# Altium PCB PCB1.PcbDoc
Units mm, origin at the board's own origin, x right, y up, seen from the top; angles counter-clockwise.
Board outline 44.5 x 44.5 mm, 2 copper layers (Top Layer, Bottom Layer); 27 components, 28 nets, 123 pads, 16 vias.
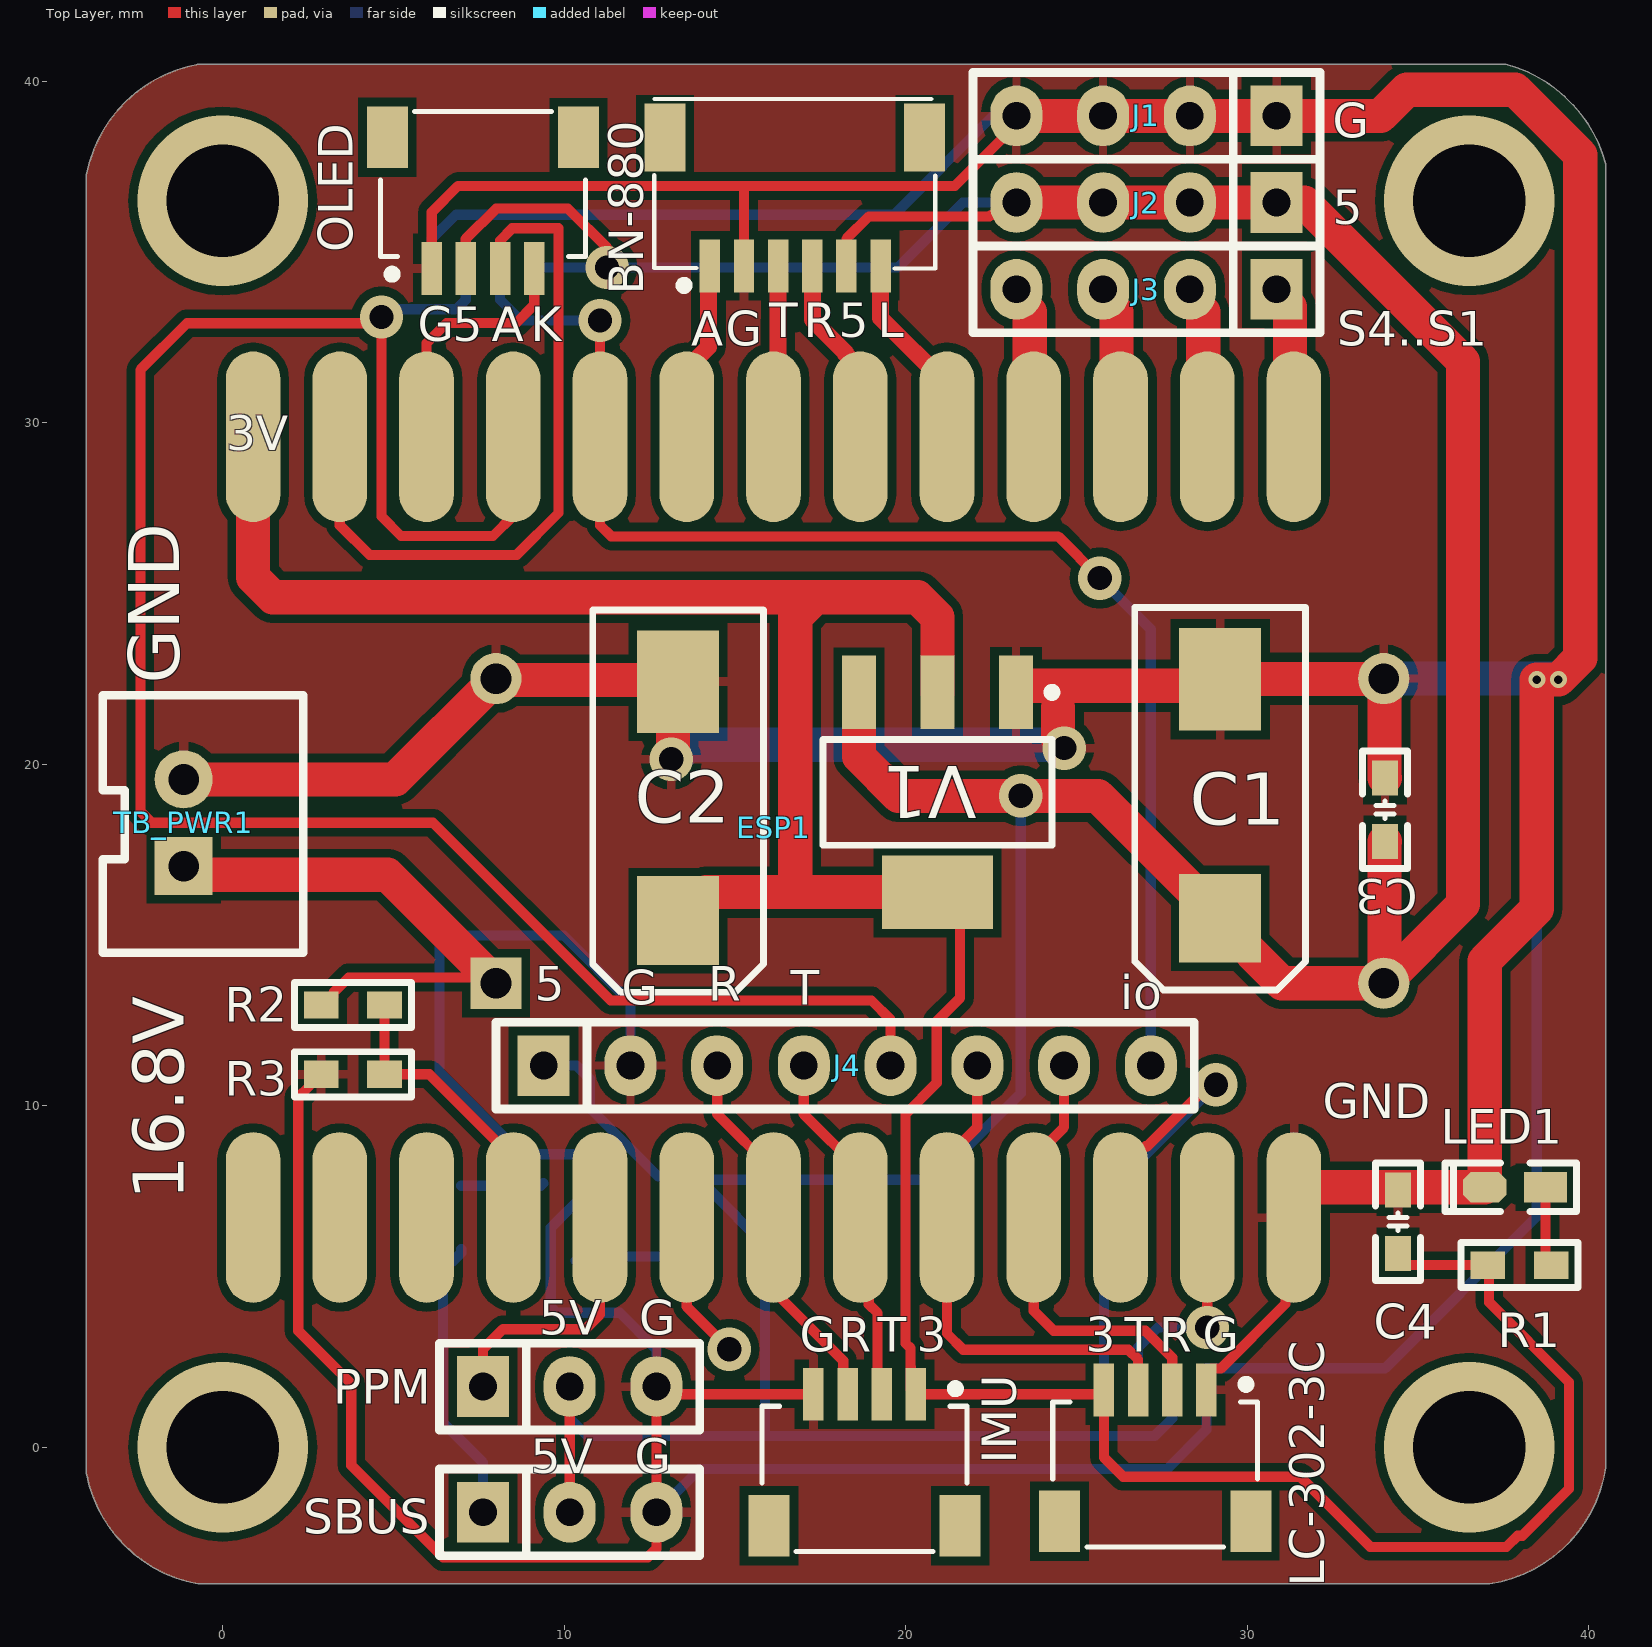
[diagram p0: Top Layer view]
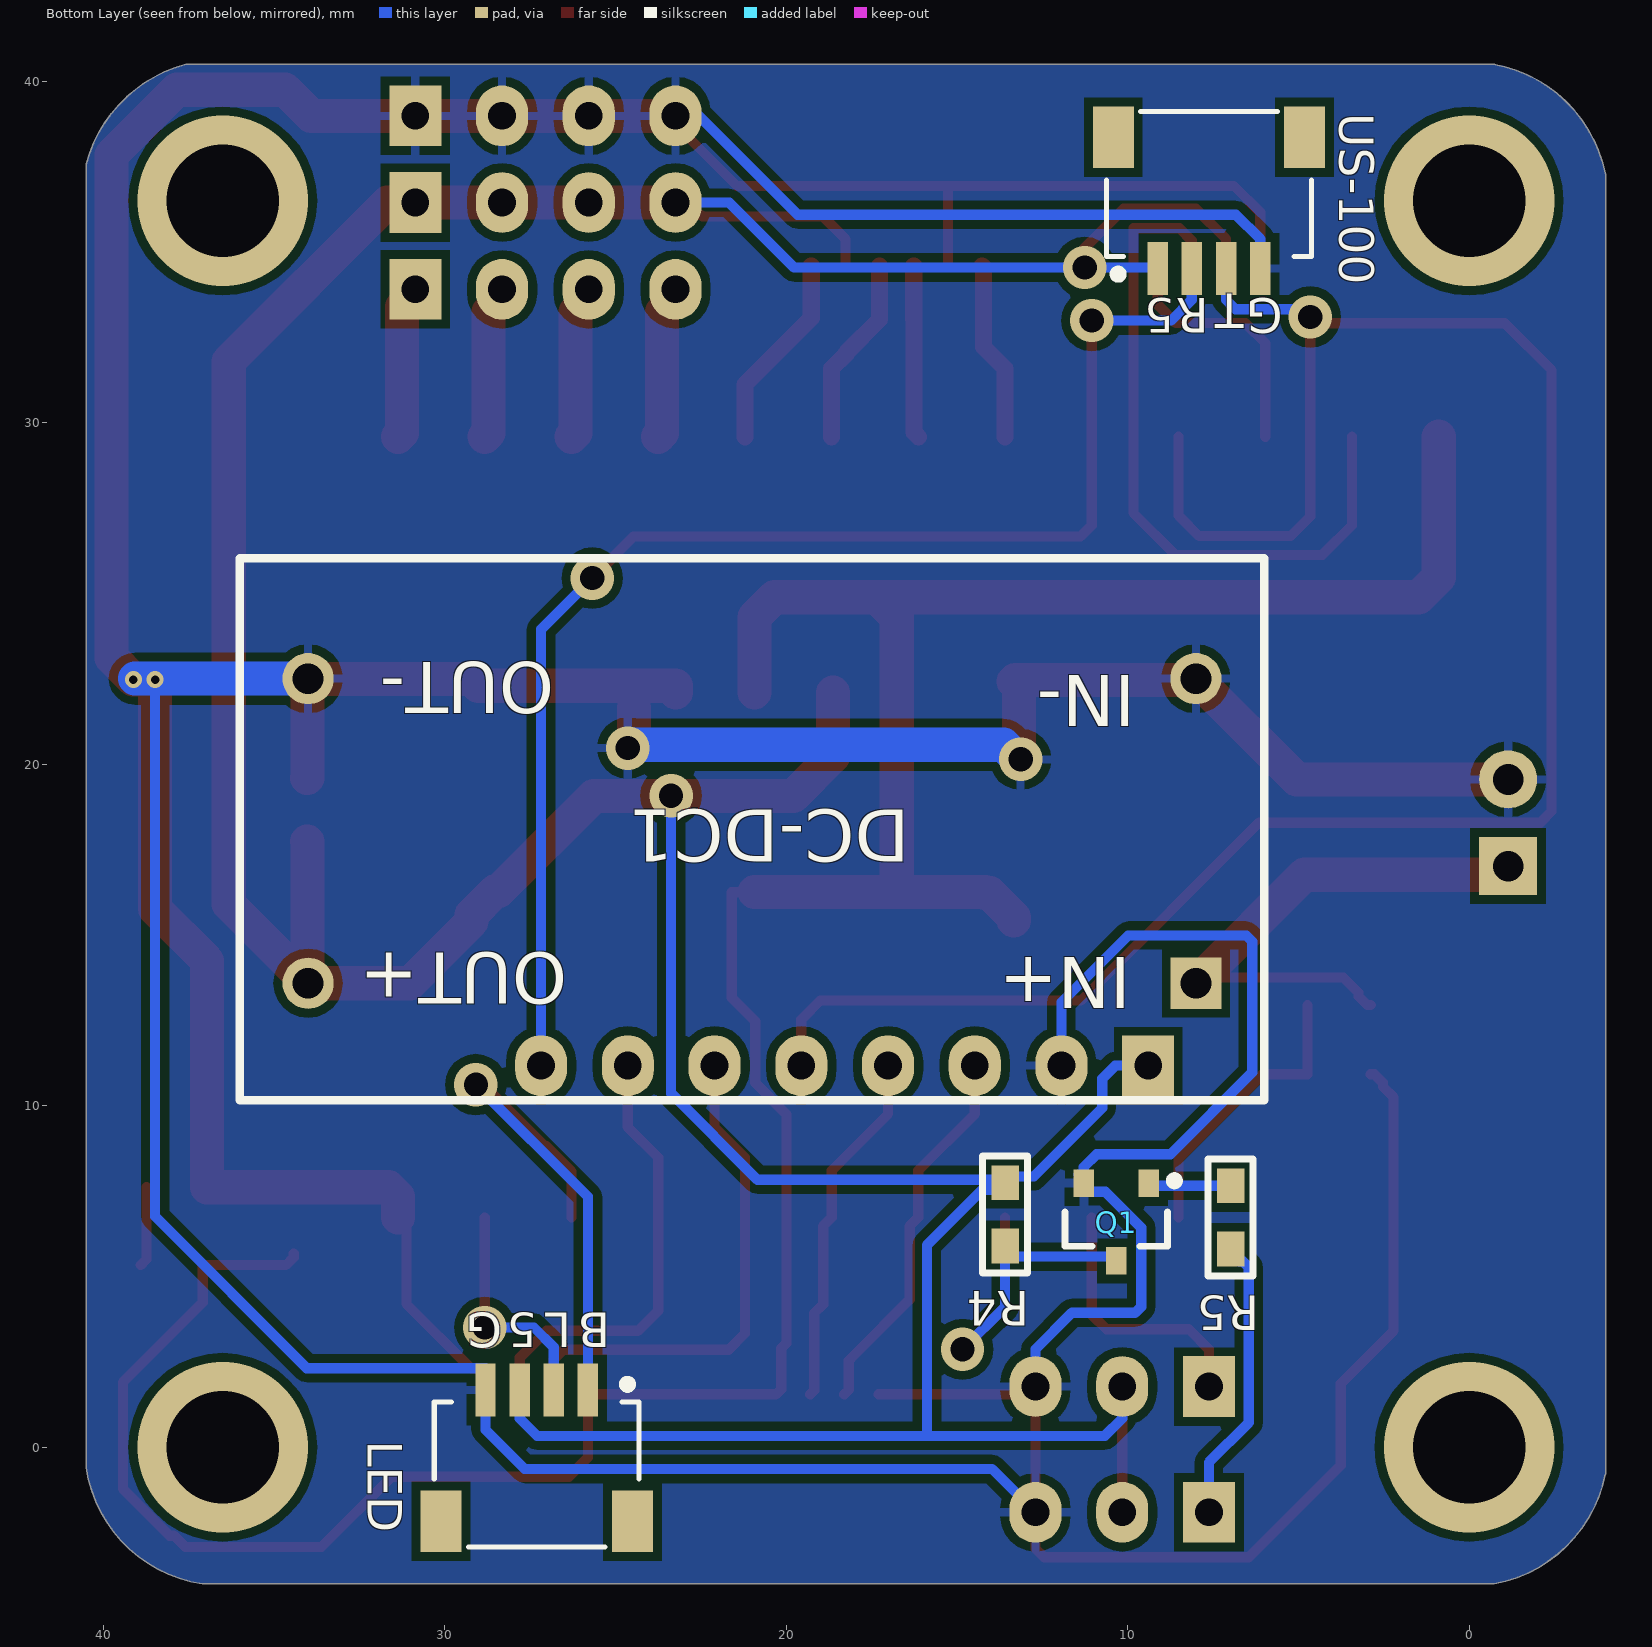
[diagram p1: Bottom Layer view, seen from below]

## Layer stack, top to bottom
Top Solder: solder mask 0.0102, Solder Resist, Dk 3.5
Top Layer: signal copper 0.0356
Dielectric 1: dielectric 0.32, FR-4, Dk 4.8
Bottom Layer: signal copper 0.0356
Bottom Solder: solder mask 0.0102, Solder Resist, Dk 3.5

## Board outline
-4,-0.797 -4,37.275 -3.981,37.321 cw(c0,36.5) -0.7,40.504 -0.749,40.5 37.582,40.5 cw(c36.5,36.5) 40.5,37.582 40.5,-0.602 cw(c36.5,0) 37.102,-4 -0.73,-4 cw(c0,0)

## Design rules (kind name [scope] priority, off if disabled: settings)
Clearance [All] p1: gap=0.254 ignorepadtopadclearanceinfootprint=FALSE except(0: Arc-Hole Track-Hole SMDPad-Hole THPad-Hole Via-Hole Fill-Hole Poly-Hole Region-Hole Text-Hole)
PolygonConnect [All] p1: connectstyle=Relief reliefconductorwidth=0.254 reliefentries=4 polygonreliefangle="90 Angle" airgapwidth=0.254
RoutingVias [All] p1: holewidth=0.711 width=1.27 viastyle="Through Hole" minholewidth=0.711 minwidth=1.27 maxholewidth=0.711 maxwidth=1.27
SolderMaskExpansion [All] p1: expansion=0.102 istentingtop=FALSE
Width [All] p1: maxlimit=2 minlimit=0.254 preferedwidth=0.3
30 further rules are at their usual default settings.

## Components (designator, comment, footprint, x,y, rotation, side; value= is the part's Value field where it differs from the comment)
BN-880 "Pin HDR1X6" "SH1.0 S-W-6P" 16.754,36.654 r180 top
C1 "100uf" C7343-D 29.21,18.994 r270 top
C2 "100uf" C7343-D 13.335,18.923 r270 top
C3 "104" "C 0603_M" 34.036,18.669 r270 top
C4 "104" "C 0603_M" 34.417,6.604 r270 top
DC-DC1 "DC-DC" DC-DC 8.001,13.589 r0 bottom
ESP1 "ESP32" esp32 0.889,6.731 r0 top
IMU "Female HDR1X4" "SH1.0 S-W-4P" 18.796,-3.048 r0 top
J1 "Pin HDR1X4" "Pin HDR1X4/2.54mm-S" 30.861,38.989 r270 top
J2 "Pin HDR1X4" "Pin HDR1X4/2.54mm-S" 30.861,36.449 r270 top
J3 "Pin HDR1X4" "Pin HDR1X4/2.54mm-S" 30.861,33.909 r270 top
J4 "Female HDR1X8" Fe-HDR1X8/2.54-S 9.398,11.176 r90 top
LC-302-3C "Female HDR1X4" "SH1.0 S-W-4P" 27.305,-2.921 r0 top
LED "Female HDR1X4" "SH1.0 S-W-4P" 27.305,-2.921 r180 bottom
LED1 "红色" "LED 0603R" 37.846,7.62 r180 top
OLED "Female HDR1X4" "SH1.0 S-W-4P" 7.62,39.116 r180 top
PPM "HDR-1X3" "Pin HDR1X3/2.54mm-S" 7.62,1.778 r90 top
Q1 "SS8050" SOT23-3L 10.335,6.586 r0 bottom
R1 "1k" "R 0603_M" 37.973,5.334 r180 top
R2 "4.7K" "R 0603_M" 3.81,12.954 r180 top
R3 "1K" "R 0603_M" 3.81,10.922 r0 top
R4 "10K" "R 0603_M" 13.589,6.82 r270 bottom
R5 "1k" "R 0603_M" 6.985,6.731 r270 bottom
SBUS "HDR-1X3" "Pin HDR1X3/2.54mm-S" 7.62,-1.905 r90 top
TB_PWR1 "TB002-500-02BE" XH2.54-LI-2P -1.143,18.288 r90 top
US-100 "Female HDR1X4" "SH1.0 S-W-4P" 7.62,39.116 r0 bottom
V1 "AMS1117 3.3" SOT223 23.232,22.106 r270 top

## Footprints (in the part's own frame and the unit in brackets; to place one, negate y for a bottom-side part, rotate by r counter-clockwise, add the part's x,y. Pads: shape width x height; smd on the part's side, far side on the other; paste and mask are expansions set on the pad)
C7343-D [mm]
  rect 2.6x2.4 smd: 1(3.5,0)
  rect 3x2.4 smd: 2(-3.5,0)
  silkscreen extent -5.6,-2.5 5.6,2.5, body extent -3.8,-2.3 3.8,2.3, height 3.1
"C 0603_M" [mil] "无极性贴片电容"
  rect 40x30 smd: 1(-36.5,0) 2(36.5,0)
  silkscreen extent -68,-26 67,26, body extent -31,-16 31,16, height 32
DC-DC [mm]
  rect 1.5x1.5 hole 0.9: 1(0,0)
  round 1.5 hole 0.9: 2(0,-8.92) 3(26,-8.92) 4(26,0)
  silkscreen extent -2,-12.45 28,3.43
esp32 [mm]
  oval 1.6x5 smd: 1(0,0) 2(2.54,0) 3(5.08,0) 4(7.62,0) 5(10.16,0) 6(12.7,0) 7(15.24,0) 8(17.78,0) 9(20.32,0) 10(22.86,0) 11(25.4,0) 12(27.94,0) 13(30.48,0) 14(0,22.86) 15(2.54,22.86) 16(5.08,22.86) 17(7.62,22.86) 18(10.16,22.86) 19(12.7,22.86) 20(15.24,22.86) 21(17.78,22.86) 22(20.32,22.86) 23(22.86,22.86) 24(25.4,22.86) 25(27.94,22.86) 26(30.48,22.86)
  body extent -1.55,-2.05 32,24.88, height 7.55
Fe-HDR1X8/2.54-S [mil]
  rect 70x60 hole 32: 1(0,0)
  oval 70x60 hole 32: 2(0,-100) 3(0,-200) 4(0,-300) 5(0,-400) 6(0,-500) 7(0,-600) 8(0,-700)
  silkscreen extent -50,-750 50,55, body extent -49,-755 49,55, height 126
"LED 0603R" [mil] "红色0603LED"
  rect 50x35 smd: 1(-35,0.26)
  oct 50x35 smd: 2(35,0.26)
  silkscreen extent -71,-28 81,28, body extent -31,-16 31,16, height 24
"Pin HDR1X3/2.54mm-S" [mil]
  rect 70x60 hole 32: 1(0,0)
  oval 70x60 hole 32: 2(0,-100) 3(0,-200)
  silkscreen extent -50,-250 50,50, body extent -50,-250 50,50, height 336
"Pin HDR1X4/2.54mm-S" [mil]
  rect 70x60 hole 32: 1(0,0)
  oval 70x60 hole 32: 2(0,-100) 3(0,-200) 4(0,-300)
  silkscreen extent -50,-350 50,50, body extent -50,-350 50,50, height 336
"R 0603_M" [mil] "1/10W贴片电阻"
  rect 40x31.5 smd: 1(-36.5,0) 2(36.5,0)
  silkscreen extent -68,-26 67,26, body extent -31,-16 31,16, height 16
"SH1.0 S-W-4P" [mm]
  rect 1.2x1.8 smd: 0(-2.8,0.75) 0(2.8,0.75)
  rect 0.6x1.55 smd: 1(1.5,4.6) 2(0.5,4.6) 3(-0.5,4.6) 4(-1.5,4.6)
  silkscreen extent -3,0 3,4.89, body extent -3,0 3,4.95, height 2.92
"SH1.0 S-W-6P" [mm]
  rect 1.2x2 smd: 0(-3.8,-1.7) 0(3.8,-1.7)
  rect 0.6x1.55 smd: 1(2.489,2.057) 2(1.489,2.057) 3(0.489,2.057) 4(-0.511,2.057) 5(-1.511,2.057) 6(-2.511,2.057)
  silkscreen extent -4.11,-2.83 4.11,2.76, body extent -3.99,-2.48 4.01,2.47, height 2.9
SOT23-3L [mm]
  rect 0.6x0.8 smd: 1(-0.95,-1.143) 2(0.95,-1.143) 3(0,1.125)
  silkscreen extent -1.83,-1.34 1.5,0.7, body extent -1.5,-1.2 1.5,1.2, height 1.05
SOT223 [mm]
  rect 2.15x1 smd: 1(0,0) 2(0,-2.3) 3(0,-4.6)
  rect 2.15x3.25 smd: 2(5.85,-2.3)
  silkscreen extent -0.12,-5.65 4.47,1.18, body extent -0.56,-5.54 6.4,0.96, height 1.7
XH2.54-LI-2P [mm] "接插件，2P"
  rect 1.7x1.7 hole 0.9: 1(-1.27,0)
  round 1.7 hole 0.9: 2(1.27,0)
  silkscreen extent -3.81,-3.51 3.74,2.37, body extent -3.77,-3.3 3.77,2.4, height 7.05

## Part data
C1 C2: library part C-CD, "贴片钽电容", BOM名称=贴片钽电容, 版权归属=源创客, 学习资源=www.ooocke.com
C3 C4: library part C, "无极性贴片电容", BOM名称=无极性贴片电容, 版权归属=源创客, 材质=X7R, 学习资源=www.ooocke.com
LED1: library part LED-F234, "方形LED", BOM名称=方形LED, 版权归属=源创客, 学习资源=www.ooocke.com
PPM SBUS: library part "Header 3", "3P接插件", BOM名称=3P接插件, 版权归属=源创客, 学习资源=www.ooocke.com
Q1: library part 8050-SMD, "高频放大-NPN型", BOM名称=高频放大-NPN型, 版权归属=源创客, 属性="40V 1.5A 1W 100MHZ", 学习资源=www.ooocke.com
R1 R2 R3 R4 R5: library part R, "贴片电阻", BOM名称=贴片电阻, 版权归属=源创客, 学习资源=www.ooocke.com
TB_PWR1: Supplier Part Number 1=490-TB002-500-02BE, Supplier 1=Mouser
V1: library part LM317, "可调线性稳压芯片", BOM名称=可调线性稳压芯片, 版权归属=源创客, 学习资源=www.ooocke.com

## Via types
v1: diameter 1.27, hole 0.711, Top Layer to Bottom Layer, 10 vias
v2: diameter 5, hole 3.3, Top Layer to Bottom Layer, 4 vias
v3: diameter 0.5/0.5 (per signal layer), hole 0.25, Top Layer to Bottom Layer, 2 vias

## Nets (pads, with @x,y where several pads share a name; then routed paths per layer and width w, separated by ;. In a path a pad name is that pad's centre, name@x,y a point inside that pad or via, vN(x,y) a via of type N, cw(c..) or ccw(c..) an arc to the next point about the centre after c; other vN are vias at no path point)
+3.3: C2.1 C4.2 ESP1.14 IMU.1 LC-302-3C.4 R1.2 V1.2 | length 93.2
  Top Layer w0.3: V1.2@20.932,16.256 21.593,16.256 21.593,13.16 20.907,12.474 20.907,10.671 19.993,9.756 19.993,3.049 20.144,2.898 20.144,2.353 20.146,2.351 20.146,1.702 IMU.1 25.678,1.552 LC-302-3C.4 25.805,-0.298 26.368,-0.861 31.55,-0.861 33.607,-2.918 37.595,-2.918 37.925,-2.588 38.052,-2.588 39.424,-1.216 39.424,1.908 37.084,4.247 37.084,5.296 R1.2 34.648,5.334 34.417,5.565 C4.2
  Top Layer w1: ESP1.14 0.889,25.478 1.475,24.892 17.35,24.892 ; C2.1 13.335,15.523 14.035,16.223 14.135,16.223 14.168,16.256 16.764,16.256 ; V1.2@20.932,16.256 16.764,16.256 ; V1.2@20.932,22.106 20.932,24.306 20.346,24.892 17.35,24.892 ; 16.764,16.256 16.764,24.306 17.35,24.892
+5: BN-880.5 C1.1 C3.2 DC-DC1.4 J2.1 J2.2 J2.3 J2.4 J4.1 LED.3 OLED.2 PPM.2 R4.1 SBUS.2 US-100.1 V1.3 | length 151.3
  Top Layer w0.3: OLED.2 7.12,35.385 8.009,36.274 10.112,36.274 11.255,35.131 v1(11.255,34.547) ; SBUS.2 PPM.2 ; BN-880.5 18.265,35.385 18.925,36.045 22.453,36.045 22.496,36.088 22.88,36.088 J2.4 ; V1.3 18.632,20.23 18.632,20.145 19.699,19.078 v1(23.371,19.078)
  Top Layer w1: V1.3 18.632,20.23 19.794,19.068 25.636,19.068 28.41,16.294 28.51,16.294 29.21,15.594 C1.1 29.21,15.394 31.015,13.589 DC-DC1.4 DC-DC1.4@34.019,13.607 ; J2.4 J2.3 J2.2 J2.1 31.672,36.449 36.322,31.799 36.322,15.91 DC-DC1.4@34.019,13.607 ; C3.2 34.027,17.742 34.019,17.734 DC-DC1.4@34.019,13.607
  Bottom Layer w0.3: US-100.1 9.12,34.547 v1(11.255,34.547) 19.767,34.547 21.669,36.449 J2.4 ; J4.1 10.366,11.176 10.747,10.795 10.747,9.934 12.754,7.928 13.589,7.928 R4.1 ; PPM.2 10.16,0.841 10.668,0.333 15.827,0.333 ; v1(23.371,19.078) 23.371,10.366 20.842,7.837 13.499,7.837 R4.1 ; LED.3 27.805,0.841 27.297,0.333 15.827,0.333 ; R4.1 13.8,7.536 14.263,7.536 15.878,5.921 15.878,0.384 15.827,0.333
+16.8: DC-DC1.1 R2.2 TB_PWR1.1 | length 15.9
  Top Layer w0.3: R2.2 2.991,12.954 3.241,13.204 3.241,13.312 3.687,13.758 7.832,13.758 DC-DC1.1
  Top Layer w1: TB_PWR1.1 -0.889,16.764 4.826,16.764 DC-DC1.1@7.832,13.758
ADC1: ESP1.4 R2.1 R3.2 | length 8.6
  Top Layer w0.3: R2.1 4.737,11.915 R3.2 6.048,10.922 8.509,8.461 ESP1.4
ADO: ESP1.10 J4.7 LC-302-3C.2 | length 13.1
  Top Layer w0.3: J4.7 24.638,9.375 23.749,8.486 ESP1.10 23.749,3.999 24.336,3.412 27.012,3.412 27.805,2.619 LC-302-3C.2
BUZZER: ESP1.11 LED.1 | length 15.5
  Top Layer w0.3: ESP1.11 26.289,8.079 27.027,8.817 27.071,8.817 28.874,10.62 v1(29.086,10.62)
  Bottom Layer w0.3: LED.1 25.805,7.339 v1(29.086,10.62)
GND: BN-880.2 C1.2 C2.2 C3.1 C4.1 DC-DC1.2 DC-DC1.3 ESP1.13 IMU.4 J1.1 J1.2 J1.3 J1.4 J4.2 LC-302-3C.1 LED1.2 LED.4 OLED.1 PPM.3 Q1.2 R3.1 SBUS.3 TB_PWR1.2 US-100.4 V1.1 | length 263.2
  Top Layer w0.3: R3.1 2.775,10.922 2.525,10.672 2.525,10.564 2.213,10.252 2.213,3.406 3.762,1.857 3.762,-0.531 6.454,-3.223 12.446,-3.223 12.7,-2.969 SBUS.3 PPM.3 12.926,1.552 IMU.4 ; OLED.1 6.12,36.168 6.886,36.934 15.263,36.934 ; BN-880.2 15.265,36.932 15.263,36.934 ; V1.1 24.022,22.106 24.455,21.673 ; J1.4 23.241,38.735 21.44,36.934 15.263,36.934 ; 23.828,22.3 23.925,22.203 ; LC-302-3C.1 28.805,2.154 28.955,2.304 29.228,2.304 31.12,4.196 31.12,6.482 ESP1.13
  Top Layer w1: TB_PWR1.2 5.05,19.558 DC-DC1.2 8.044,22.466 13.292,22.466 C2.2 13.186,22.274 13.186,20.197 v1(13.135,20.145) ; V1.1 23.232,22.3 23.828,22.3 29.016,22.3 C1.2 29.218,22.502 33.994,22.502 34.019,22.477 34.019,19.604 34.027,19.596 C3.1 ; J1.4 J1.3 J1.2 J1.1 33.908,38.989 34.673,39.754 37.848,39.754 39.754,37.848 39.754,23.192 ; 24.455,21.673 24.455,20.734 24.641,20.548 v1(24.641,20.475) ; ESP1.13 31.369,7.336 31.646,7.613 LED1.2 36.957,14.244 38.481,15.769 v3(38.481,22.479) v3(39.116,22.479) 39.754,23.117 39.754,23.192 ; 39.754,24.384 39.754,23.192
  Bottom Layer w0.3: US-100.4 6.12,35.385 6.831,36.096 19.665,36.096 22.558,38.989 J1.4 ; Q1.2@11.435,7.979 Q1.2@11.285,7.829 ; J4.2 11.938,13.033 9.985,14.986 6.526,14.986 6.35,14.81 6.35,10.978 8.745,8.584 10.908,8.584 11.285,8.207 Q1.2@11.285,7.829 ; SBUS.3 13.97,-0.635 27.661,-0.635 28.805,0.509 LED.4 28.805,2.314 34.039,2.314 38.481,6.756 v3(38.481,22.479) ; PPM.3 12.7,2.873 11.633,3.94 9.782,3.94 9.604,4.118 9.604,6.429 10.654,7.479 11.135,7.479 11.285,7.629 Q1.2 Q1.2@11.285,7.829
  Bottom Layer w1: v1(13.135,20.145) 13.208,20.145 13.637,20.574 24.469,20.574 24.568,20.475 v1(24.641,20.475) ; DC-DC1.3 v3@39.071,22.509
INT: ESP1.18 J4.8 US-100.2 | length 40.3
  Top Layer w0.3: v1(11.049,32.995) ESP1.18 11.049,27.003 11.379,26.673 24.463,26.673 v1(25.682,25.454)
  Bottom Layer w0.3: US-100.2 8.12,33.607 8.732,32.995 v1(11.049,32.995) ; v1(25.682,25.454) 27.178,23.958 J4.8
LED: ESP1.12 LED.2 | length 6.7
  Top Layer w0.3: v1(28.829,3.508) ESP1.12
  Bottom Layer w0.3: LED.2 26.805,2.929 27.384,3.508 v1(28.829,3.508)
NetLED1_1: LED1.1 R1.1 | length 2.3
  Top Layer w0.3: LED1.1 38.735,5.499 R1.1
NetQ1_1: Q1.1 R5.1 | length 2.4
  Bottom Layer w0.3: R5.1 9.314,7.658 Q1.1
NetR5_2: R5.2 SBUS.1 | length 8.5
  Bottom Layer w0.3: R5.2 6.985,5.696 6.735,5.446 6.627,5.446 6.454,5.273 6.454,0.722 7.62,-0.444 SBUS.1
PPM: ESP1.5 PPM.1 | length 7.8
  Top Layer w0.3: PPM.1 7.62,2.873 8.204,3.457 10.62,3.457 11.049,3.886 ESP1.5
PWM1: ESP1.26 J3.1 | length 4.5
  Top Layer w1: J3.1 30.861,33.782 31.254,33.389 31.254,29.706 ESP1.26
PWM2: ESP1.25 J3.2 | length 4.5
  Top Layer w1: J3.2 28.321,33.64 28.714,33.247 28.714,29.706 ESP1.25
PWM3: ESP1.24 J3.3 | length 4.5
  Top Layer w1: J3.3 25.781,33.64 26.174,33.247 26.174,29.706 ESP1.24
PWM4: ESP1.23 J3.4 | length 4.5
  Top Layer w1: J3.4 23.241,33.64 23.634,33.247 23.634,29.706 ESP1.23
RX1: ESP1.7 IMU.3 J4.3 | length 11.2
  Top Layer w0.3: J4.3 14.478,9.756 16.129,8.105 ESP1.7 16.378,6.482 16.378,4.329 17.986,2.721 18.17,2.537 18.17,1.678 IMU.3
RX4: BN-880.4 ESP1.21 | length 5.6
  Top Layer w0.5: BN-880.4 17.265,33.027 18.239,32.053 18.239,32.019 18.669,31.589 ESP1.21
SBUS: ESP1.6 Q1.3 R4.2 | length 11.3
  Top Layer w0.3: ESP1.6 13.589,4.12 v1(14.836,2.873)
  Bottom Layer w0.3: Q1.3 10.462,5.588 13.339,5.588 R4.2@13.589,5.838 ; R4.2 R4.2@13.589,5.838 ; v1(14.836,2.873) 13.589,4.12 R4.2@13.589,5.838
SCK: ESP1.16 OLED.4 | length 7.4
  Top Layer w0.3: ESP1.16 5.969,32.337 6.553,32.921 8.588,32.921 9.12,33.453 OLED.4
SCL1: BN-880.6 ESP1.22 | length 5.8
  Top Layer w0.5: BN-880.6 19.265,33.072 21.209,31.127 ESP1.22
SDA: ESP1.15 OLED.3 | length 20.9
  Top Layer w0.3: ESP1.15 3.429,27.003 4.299,26.133 8.607,26.133 9.833,27.359 9.833,35.695 8.481,35.695 8.12,35.334 OLED.3
SDA1: BN-880.1 ESP1.19 | length 5.3
  Top Layer w0.5: ESP1.19 13.589,31.589 14.224,32.224 14.224,34.556 BN-880.1
TX1: ESP1.8 IMU.2 J4.4 | length 10.6
  Top Layer w0.3: J4.4 17.018,9.756 18.669,8.105 ESP1.8 18.918,6.482 18.918,4.191 19.177,3.932 19.177,1.671 IMU.2
TX2: ESP1.9 J4.6 LC-302-3C.3 | length 15
  Top Layer w0.3: J4.6 22.098,9.375 21.209,8.486 ESP1.9 21.209,3.33 21.681,2.858 26.52,2.858 26.805,2.573 LC-302-3C.3
TX3: ESP1.17 J4.5 US-100.3 | length 62.5
  Top Layer w0.3: v1(4.651,33.099) 4.651,32.913 v1@4.651,32.769 ; ESP1.17 8.509,27.282 7.914,26.687 5.221,26.687 4.651,27.257 v1@4.651,32.769 ; J4.5 19.558,12.525 18.999,13.084 11.363,13.084 6.156,18.291 -2.08,18.291 -2.41,18.621 -2.41,31.55 -1.046,32.913 4.506,32.913 v1@4.651,32.769
  Bottom Layer w0.3: v1(4.651,33.099) 4.88,33.328 6.841,33.328 7.12,33.607 US-100.3
TX4: BN-880.3 ESP1.20 | length 5.1
  Top Layer w0.5: ESP1.20 16.256,29.718 16.256,33.02 16.265,33.029 BN-880.3
pads on no net: BN-880.0 ESP1.1 ESP1.2 ESP1.3 IMU.0 LC-302-3C.0 LED.0 OLED.0 US-100.0
copper on no net:
  other v2: 0,0 36.5,0 0,36.5 36.5,36.5

## Polygon pours and split planes (outlines as drawn)
GND on Top Layer "Top Layer-No Net" (solid, pour order 0): -4,-0.797 -4,37.275 -3.981,37.321 cw(c0,36.5) -0.7,40.504 -0.749,40.5 37.582,40.5 cw(c36.5,36.5) 40.5,37.582 40.5,-0.602 cw(c36.5,0) 37.102,-4 -0.73,-4 cw(c0,0)
GND on Bottom Layer "Top Layer-No Net1" (solid, pour order 1): -4,-0.797 -4,37.275 -3.981,37.321 cw(c0,36.5) -0.7,40.504 -0.749,40.5 37.582,40.5 cw(c36.5,36.5) 40.5,37.582 40.5,-0.602 cw(c36.5,0) 37.102,-4 -0.73,-4 cw(c0,0)

## Silkscreen, mask and mechanical layers (free items; w line width, h text height)
Top Overlay:
  text "G" at 32.512,38.354 h1
  text "5" at 32.512,35.814 h1
  text "T" at 16.002,32.512 h1
  text "R" at 17.018,32.512 h1
  text "5" at 18.034,32.512 h1
  text "L" at 19.177,32.512 h1
  text "G" at 5.715,32.385 h1
  text "5" at 6.731,32.385 h1
  text "A" at 7.874,32.385 h1
  text "K" at 9.017,32.385 h1
  text "A" at 13.716,32.258 h1
  text "G" at 14.732,32.258 h1
  text "S4..S1" at 32.639,32.258 h1
  text "GND" at -1.27,22.352 h1.5 r90
  text "5" at 9.144,13.081 h1
  text "R" at 14.224,13.081 h1
  text "G" at 11.684,12.954 h1
  text "T" at 16.637,12.954 h1
  text "io" at 26.289,12.827 h1
  text "16.8V" at -1.143,7.239 h1.5 r90
  text "5V" at 9.271,3.302 h1
  text "G" at 12.192,3.302 h1
  text "G" at 16.891,2.794 h1
  text "R" at 18.034,2.794 h1
  text "T" at 19.177,2.794 h1
  text "3" at 20.32,2.794 h1
  text "3" at 25.273,2.794 h1
  text "T" at 26.416,2.794 h1
  text "R" at 27.432,2.794 h1
  text "G" at 28.702,2.794 h1
  text "5V" at 9.017,-0.762 h1
  text "G" at 12.065,-0.762 h1
Bottom Overlay:
  text "T" at 6.604,33.782 h1 r180
  text "G" at 5.461,33.655 h1 r180
  text "R" at 7.62,33.655 h1 r180
  text "5" at 8.636,33.655 h1 r180
  text "B" at 25.146,3.937 h1 r180
  text "L" at 26.289,3.937 h1 r180
  text "5" at 27.305,3.937 h1 r180
  text "G" at 28.321,3.937 h1 r180
Mechanical 1:
  lines w0.254: -4,-0.797 -4,37.275 ; -3.987,-0.797 ccw(c0,0) -0.73,-4 37.102,-4 ccw(c36.5,0) 40.5,-0.602 40.5,37.582 ccw(c36.5,36.5) 37.582,40.5 -0.749,40.5
Mechanical 13:
  lines w0.254: -3.981,37.321 cw(c0,36.5) -0.7,40.504

## Text inside footprints (layer, text, board x,y; h text height)
DC-DC1: Bottom Overlay "IN+" at 9.906,14.351 h1.5 r180; Bottom Overlay "IN-" at 9.779,22.606 h1.5 r180; Bottom Overlay "OUT-" at 26.797,22.987 h1.5 r180; Bottom Overlay "OUT+" at 26.416,14.478 h1.5 r180
ESP1: Top Overlay "GND" at 32.215,9.638 h1; Top Overlay "3V" at 0.1,29.196 h1